# Altium PCB usb_breakout_004.PcbDoc
Units mil, origin at the board's own origin, x right, y up, seen from the top; angles counter-clockwise.
Board outline 1417.32 x 1417.32 mil, 2 copper layers (Top Layer, Bottom Layer); 32 components, 26 nets, 132 pads, 33 vias.
Unrouted connection lines stored in the file: 1.
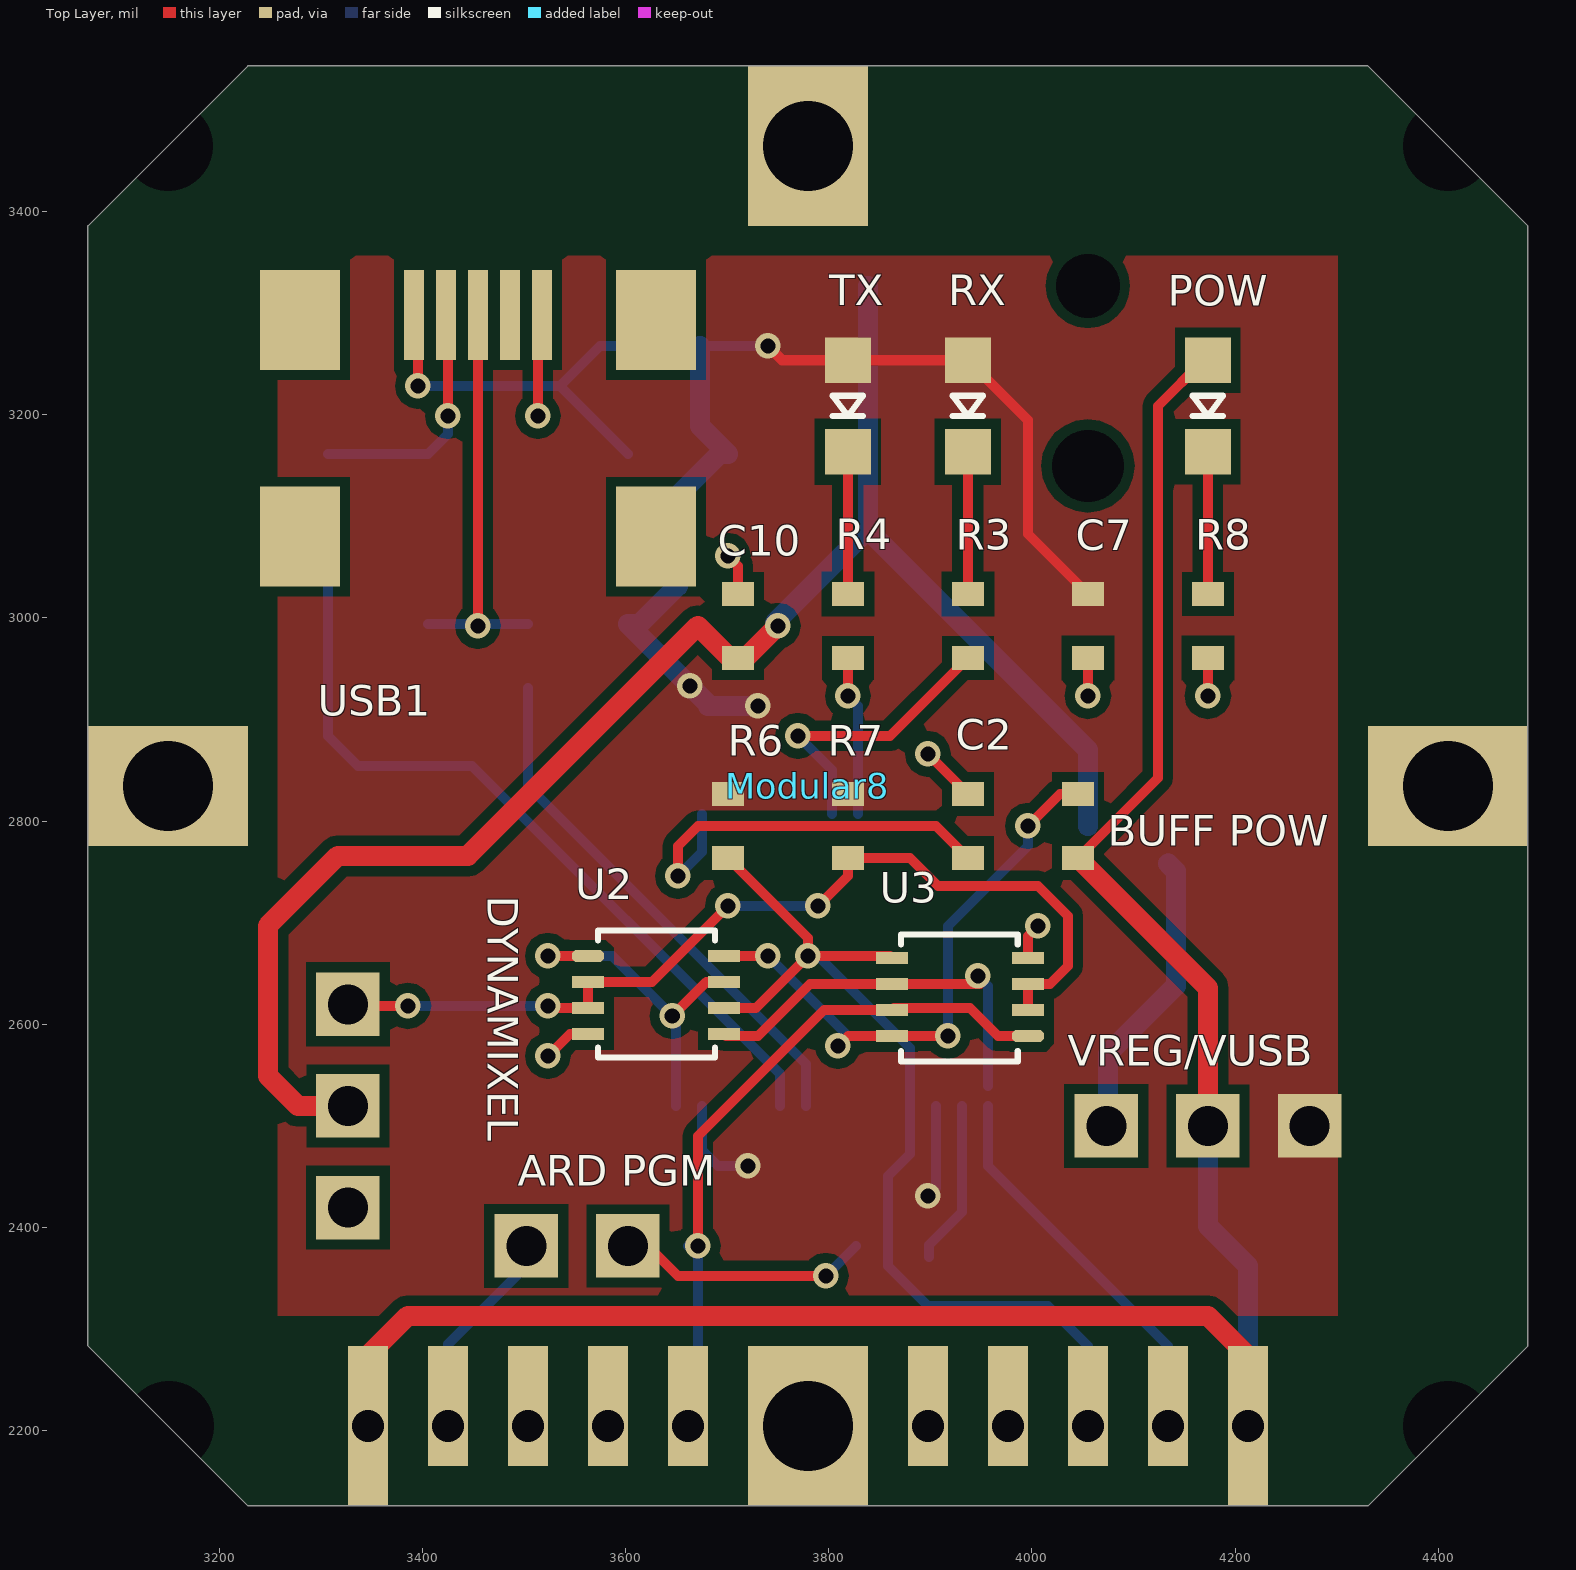
[diagram p0: Top Layer view]
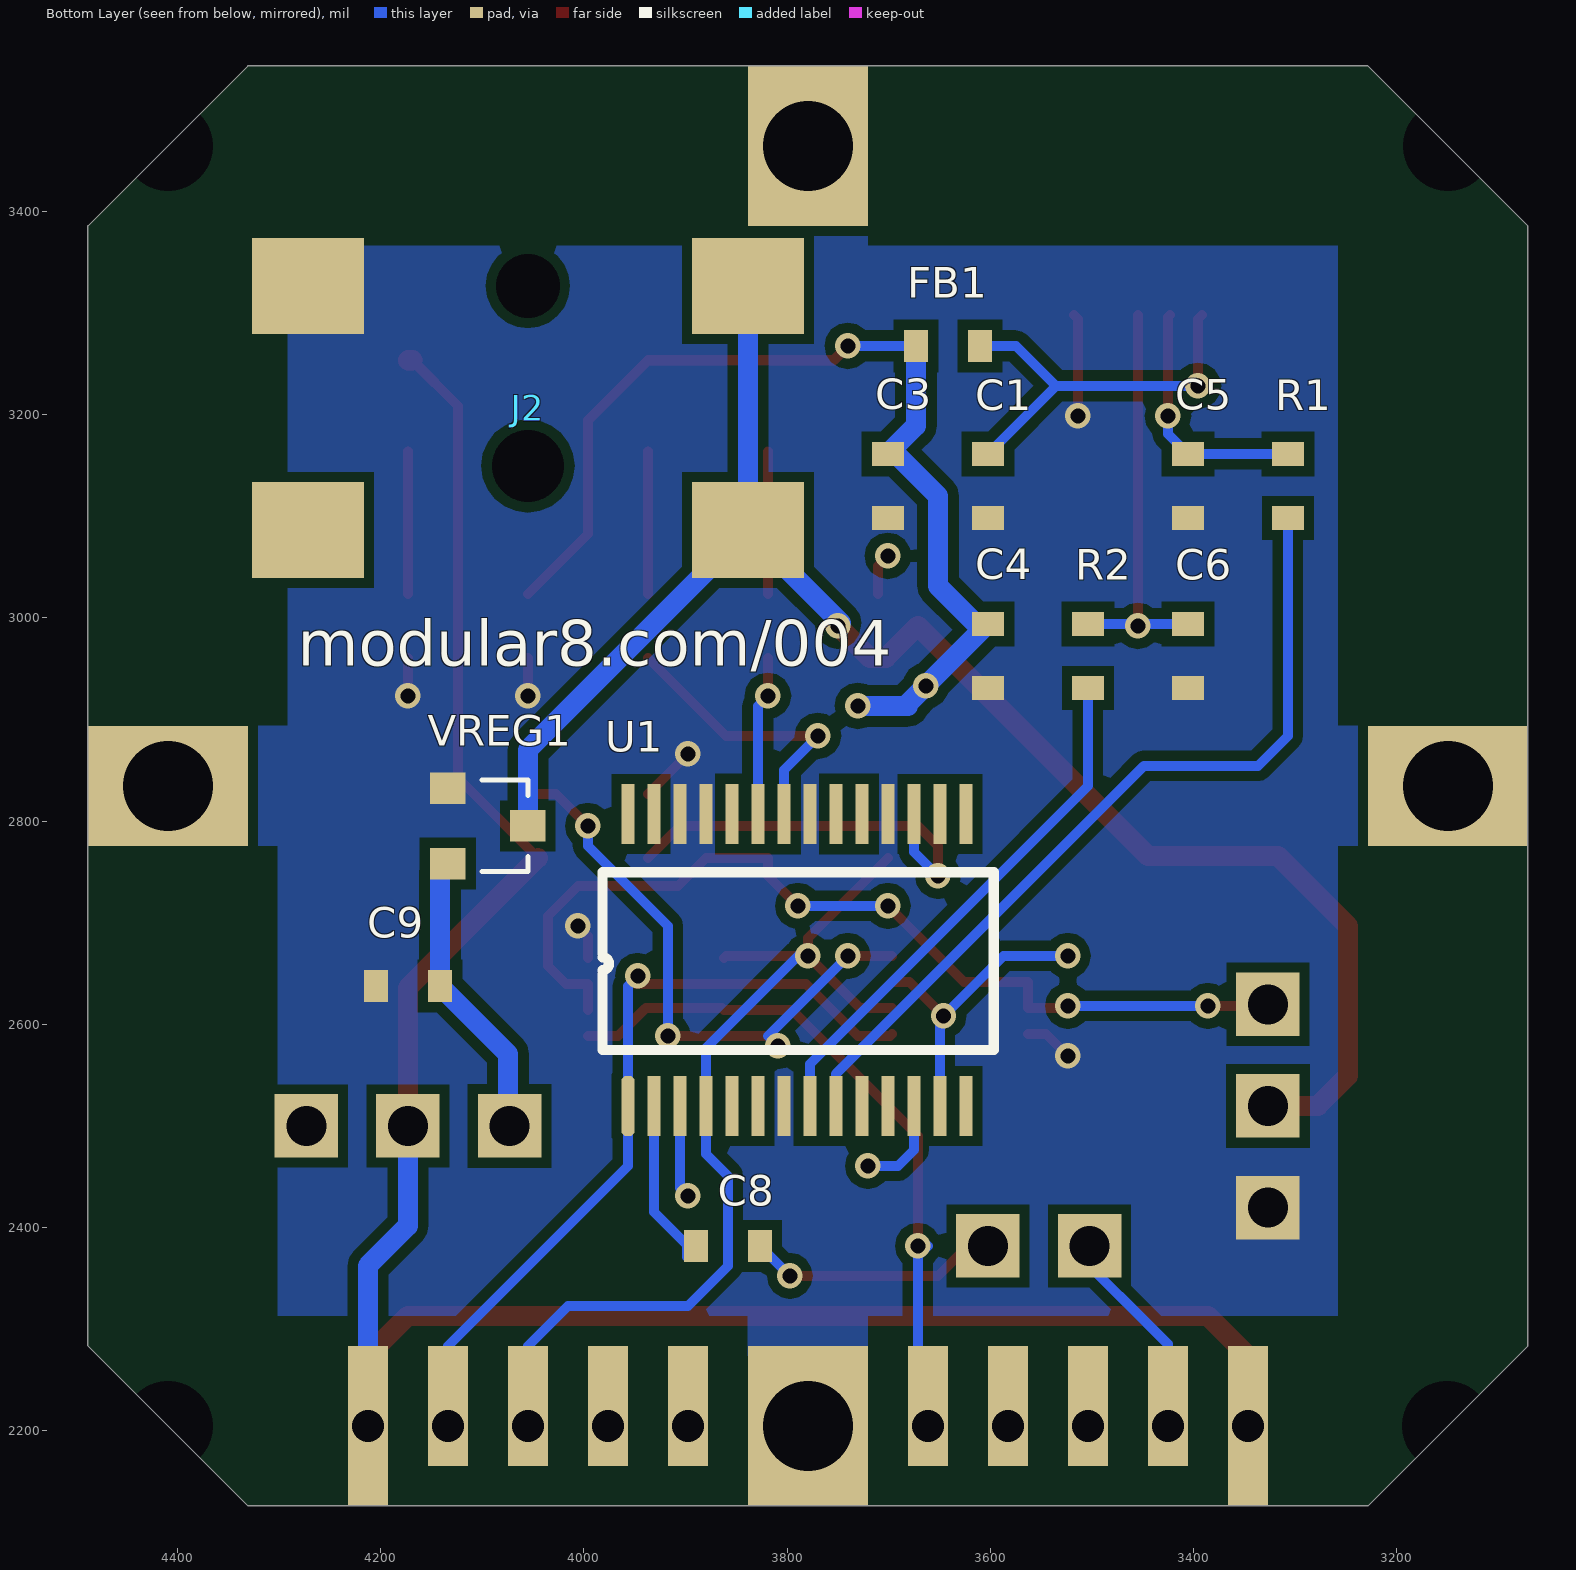
[diagram p1: Bottom Layer view, seen from below]

## Layer stack, top to bottom
Top Solder: solder mask 0.4, Solder Resist, Dk 3.5
Top Layer: signal copper 1.4
Dielectric 1: dielectric 12.6, FR-4, Dk 4.8
Bottom Layer: signal copper 1.4
Bottom Solder: solder mask 0.4, Solder Resist, Dk 3.5

## Board outline
3228.35,2125.98 3070.87,2283.46 3070.87,3385.83 3228.35,3543.31 4330.71,3543.31 4488.19,3385.83 4488.19,2283.46 4330.71,2125.98

## Design rules (kind name [scope] priority, off if disabled: settings)
Clearance [All] p1: gap=10
PolygonConnect [All] p1: connectstyle=Direct reliefconductorwidth=10 reliefentries=4 polygonreliefangle="90 Angle" airgapwidth=10
RoutingVias [All] p1: holewidth=28 width=50 viastyle="Through Hole" minholewidth=28 minwidth=50 maxholewidth=28 maxwidth=50
SolderMaskExpansion [All] p1: expansion=4
UnpouredPolygon [All] p1: allowunpoured=FALSE
Width [All] p1: maxlimit=20 minlimit=10 preferedwidth=10
29 further rules are at their usual default settings.

## Components (designator, comment, footprint, x,y, rotation, side; value= is the part's Value field where it differs from the comment)
"ARD PGM" "2x1" "2x1 THRU HOLES 0.1\" PITCH" 3602.36,2381.89 r90 top
"BUFF POW" "R 0" 0603 4045.28,2795.28 r90 top
C1 "C 0.01uF 25V" 0603 3602.36,3129.92 r270 bottom
C2 "C 0.1uF 25V" 0603 3937.01,2795.28 r90 top
C3 "C 0.1uF 25V" 0603 3700.79,3129.92 r270 bottom
C4 "C 10uF 25V" 0603 3602.36,2962.6 r270 bottom
C5 "C 47pF 50V" 0603 3405.51,3129.92 r270 bottom
C6 "C 47pF 50V" 0603 3405.51,2962.6 r270 bottom
C7 "C 0.1uF 25V" 0603 4055.12,2992.13 r270 top
C8 "C 0.1uF 25V" 0603 3858.27,2381.89 r180 bottom
C9 "C 1uF 25V" 0603 4173.23,2637.8 r180 bottom
C10 "C 0.1uF 25V" 0603 3710.63,2992.13 r90 top
DYNAMIXEL "Dynamixel 3-pin" "DYNAMIXEL 3-PIN" 3326.77,2519.68 r180 top (schematic designator J1)
FB1 "L Ferrite Bead 600ohm" 0603 3641.73,3267.72 r0 bottom
J2 "9V" "DC JACK 2.1MM SMT" 4055.12,3326.77 r270 bottom
Modular8 "modular8_rev2_D" "modular8 edge D flipped" 4409.45,3464.57 r180 top locked
POW "LEDG" "0805 - LED" 4173.23,3208.66 r270 top
R1 "R 27" 0603 3307.09,3129.92 r270 bottom
R2 "R 27" 0603 3503.94,2962.6 r270 bottom
R3 "R 680" 0603 3937.01,2992.13 r270 top
R4 "R 680" 0603 3818.9,2992.13 r270 top
R6 "R 10k" 0603 3700.79,2795.28 r270 top
R7 "PULLUP?" 0603 3818.9,2795.28 r270 top
R8 "R 680" 0603 4173.23,2992.13 r270 top
RX "LEDY" "0805 - LED" 3937.01,3208.66 r270 top (schematic designator RXLED)
TX "LEDY" "0805 - LED" 3818.9,3208.66 r270 top (schematic designator TXLED)
U1 "FT232RL" SSOP28 3956.69,2519.68 r90 bottom
U2 "TC7W241FU" MSOP8 3562.99,2667.32 r0 top
U3 "TC7W241FU" MSOP8 3996.06,2588.58 r180 top
USB1 "USB connector" "USB MINI" 3454.72,2962.6 r0 top
VREG1 "MCP1754ST 5V REG" SOT-23-3 4055.12,2795.28 r270 bottom
VREG/VUSB "3x1" "3x1 THRU HOLES 0.1\" PITCH" 4173.23,2500 r270 top (schematic designator VUSB/VREG)

## Footprints (in the part's own frame and the unit in brackets; to place one, negate y for a bottom-side part, rotate by r counter-clockwise, add the part's x,y. Pads: shape width x height; smd on the part's side, far side on the other; paste and mask are expansions set on the pad)
"2x1 THRU HOLES 0.1\" PITCH" [mil]
  rect 62.5x62.5 hole 39.37 unplated: 1(0,100) 2(0,0)
"3x1 THRU HOLES 0.1\" PITCH" [mil]
  rect 62.5x62.5 hole 39.37 unplated: 1(0,100) 2(0,0) 3(0,-100)
0603 [mm]
  rect 0.6x0.8 smd: 1(-0.8,0) 2(0.8,0)
  body extent -1.2,-0.5 1.2,0.5, height 0.01
"0805 - LED" [mil]
  rect 45x45 smd: 1(-45,0) 2(45,0)
  silkscreen extent -10,-15 10,15, body extent -72,-27 72,27, height 0
"DC JACK 2.1MM SMT" [mm]
  rect 2.4x2.8 smd: 1(0,5.5) 1(6.1,5.5) 2(0,-5.5) 3(6.1,-5.5)
  rect 0x0 hole 1.6 unplated: 999(0,0)
  rect 0x0 hole 1.803 unplated: 999(4.5,0)
  body extent -5.08,-7 9.88,7
"DYNAMIXEL 3-PIN" [mil]
  rect 62.5x62.5 hole 39.37 unplated: 1(0,100) 2(0,0) 3(0,-100)
  body extent -100,-165 75,160
"modular8 edge D flipped" [mm]
  rect 0x0 hole 2.25 unplated copper offset 0.5,0: 999(0,32) 999(0,0) 999(31.976,32) 999(32,0)
  rect 4x3 hole 2.25: A_GND(0,16) C_GND(32,16)
  rect 3x4 hole 2.25: B_GND(16,0) D_GND(16,32)
  rect 1x3 hole 0.8 copper offset 0,-0.5: D_0(7,32) D_1(9,32) D_2(11,32) D_3(13,32) D_4(19,32) D_5(21,32) D_6(23,32) D_7(25,32)
  rect 1x4 hole 0.8: D_V1(27,32) D_V2(5,32)
  body extent -2,-2 34,34
MSOP8 [mm]
  oct 0.8x0.3 smd: 1(0,0)
  rect 0.8x0.3 smd: 2(0,-0.65) 3(0,-1.3) 4(0,-1.95) 5(3.4,-1.95) 6(3.4,-1.3) 7(3.4,-0.65) 8(3.4,0)
  silkscreen extent 0.25,-2.54 3.17,0.63, body extent -0.5,-2.62 3.9,0.71
SOT-23-3 [mil]
  rect 31x35 smd: 1(-37,-79) 2(37,-79) 3(0,0)
  silkscreen extent -45,-45 45,0, body extent -57,-100 57,22, height 45
SSOP28 [mm]
  oct 1.5x0.325 smd: 1(0,0)
  rect 1.5x0.325 smd: 2(0,-0.65) 3(0,-1.3) 4(0,-1.95) 5(0,-2.6) 6(0,-3.25) 7(0,-3.9) 8(0,-4.55) 9(0,-5.2) 10(0,-5.85) 11(0,-6.5) 12(0,-7.15) 13(0,-7.8) 14(0,-8.45) 15(7.3,-8.45) 16(7.3,-7.8) 17(7.3,-7.15) 18(7.3,-6.5) 19(7.3,-5.85) 20(7.3,-5.2) 21(7.3,-4.55) 22(7.3,-3.9) 23(7.3,-3.25) 24(7.3,-2.6) 25(7.3,-1.95) 26(7.3,-1.3) 27(7.3,-0.65) 28(7.3,0)
  silkscreen extent 1.4,-9.14 5.84,0.64, body extent -0.76,-9.27 8.13,0.76
"USB MINI" [mm]
  rect 0.5x2.25 smd: 0(0.8,8.525) 1(-1.6,8.525) 2(-0.8,8.525) 3(0,8.525) 4(1.6,8.525)
  rect 2x2.5 smd: 5(-4.45,2.98) 5(-4.45,8.4) 5(4.45,2.98) 5(4.45,8.4)
  body extent -5.55,0 5.55,9.75, height 4

## Part data
J2: library part "SMT 2.1MM DC JACK"
R7: library part "R 10k"

## Via types
v1: diameter 25, hole 15, Top Layer to Bottom Layer, 33 vias

## Nets (pads, with @x,y where several pads share a name; then routed paths per layer and width w, separated by ;. In a path a pad name is that pad's centre, name@x,y a point inside that pad or via, vN(x,y) a via of type N, cw(c..) or ccw(c..) an arc to the next point about the centre after c; other vN are vias at no path point)
GND: C1.2 C2.2 C3.2 C4.2 C5.2 C6.2 C7.2 C9.1 C10.2 DYNAMIXEL.1 J2.2 Modular8.D_GND R8.2 U1.7 U1.18 U1.21 U1.25 U1.26 U2.4 U3.4 USB1.4 VREG1.1 | length 356.9
  Top Layer w10: v1(3513.78,3198.82) 3513.78,3294.29 USB1.4 ; v1(3523.62,2568.9) 3545.28,2590.55 U2.4 ; 3700.79,3061.02 3710.63,3051.18 C10.2 ; v1(3897.64,2866.14) C2.2 ; U3.4 3996.06,2687.01 v1(4005.91,2696.85) ; v1(4055.12,2923.23) C7.2 ; v1(4173.23,2923.23) R8.2
"NetARD PGM_1": "ARD PGM.1" Modular8.D_7 | length 217.3
  Bottom Layer w10: Modular8.D_7 3425.2,2285.04 3522.05,2381.89
"NetARD PGM_2": "ARD PGM.2" C8.2 | length 229.2
  Top Layer w10: 3622.05,2381.89 3651.57,2352.36 v1(3797.24,2352.36)
  Bottom Layer w10: v1(3797.24,2352.36) C8.2
"NetBUFF POW_2": "BUFF POW.2" U2.8 U3.8 | length 554.7
  Top Layer w10: U2.8 v1(3740.16,2667.32) ; 3818.9,2588.58 U3.8 v1(3917.32,2588.58) ; v1(3996.06,2795.28) 4027.56,2826.77 4045.28,2826.77
  Bottom Layer w10: v1(3740.16,2667.32) 3818.9,2588.58 ; v1(3917.32,2588.58) 3917.32,2696.85 3996.06,2775.59 v1(3996.06,2795.28)
  other v1: 3809.06,2578.74
NetC1_1: C1.1 FB1.1 USB1.1 | length 387.2
  Top Layer w10: USB1.1 3395.67,3294.29 v1(3395.67,3228.35)
  Bottom Layer w10: v1@3405.51,3228.35 3535.43,3228.35 ; C1.1 3535.43,3228.35 ; FB1.1 3574.8,3267.72 3535.43,3228.35
NetC2_1: C2.1 U1.17 | length 407
  Top Layer w10: v1(3651.57,2746.06) 3651.57,2775.59 3671.26,2795.28 3905.51,2795.28 C2.1
  Bottom Layer w10: v1(3651.57,2746.06) 3675.2,2769.69 U1.17
NetC5_1: C5.1 R1.1 USB1.2 | length 244.2
  Top Layer w10: USB1.2 3425.2,3296.26 v1(3425.2,3198.82)
  Bottom Layer w10: R1.1 C5.1 3425.2,3181.1 v1(3425.2,3198.82)
NetC6_1: C6.1 R2.1 USB1.3 | length 404.5
  Top Layer w10: v1(3454.72,2992.13) USB1.3
  Bottom Layer w10: C6.1 R2.1
NetC8_1: C8.1 U1.2 | length 162.1
  Bottom Layer w10: C8.1@3898.62,2371.06 3898.62,2382.87 3931.1,2415.36 U1.2
NetC9_2: C9.2 VREG1.2 VREG/VUSB.3 | length 289.8
  Bottom Layer w20: VREG/VUSB.3 4074.8,2501.57 4074.8,2570.87 C9.2 4141.73,2750.66 VREG1.2
NetC10_1: C10.1 DYNAMIXEL.2 J2.1 VREG1.3 | length 1639.6
  Top Layer w20: DYNAMIXEL.2 3277.56,2519.69 3248.03,2549.21 3248.03,2696.85 3316.93,2765.75 3444.88,2765.75 3671.26,2992.13 3702.76,2960.63 C10.1 3718.5,2960.63 v1(3750,2992.13)
  Bottom Layer w20: v1@3747.05,2995.08 J2.1@3838.58,3086.61 ; J2.1@3838.58,3326.77 J2.1@3838.58,3086.61 ; VREG1.3 4055.12,2870.08 J2.1@3838.58,3086.61
NetJ1_3: DYNAMIXEL.3 R7.2 U2.2 U2.3 U3.2 U3.3 | length 941.8
  Top Layer w10: DYNAMIXEL.3 3328.35,2618.11 v1(3385.83,2618.11) ; v1(3523.62,2618.11) 3525.59,2616.14 U2.3 U2.2 3625.98,2641.73 v1(3700.79,2716.54) ; v1(3789.37,2716.54) 3818.9,2746.06 R7.2 3879.92,2763.78 3907.48,2736.22 4005.91,2736.22 4035.43,2706.69 4035.43,2657.48 4017.72,2639.76 U3.3 U3.2
  Bottom Layer w10: v1(3385.83,2618.11) v1(3523.62,2618.11) ; v1(3700.79,2716.54) v1(3789.37,2716.54)
NetModular8_D_0: Modular8.D_0 U1.1 U2.5 U3.6 | length 783.4
  Top Layer w10: U2.5 3698.82,2588.58 3730.32,2588.58 3781.5,2639.76 U3.6 3948.82,2639.76 3946.84,2641.74 v1(3946.84,2647.63)
  Bottom Layer w10: v1(3946.84,2647.63) 3956.69,2637.78 U1.1@3956.69,2539.37 ; U1.1 3956.69,2460.63 4133.86,2283.46 Modular8.D_0
NetModular8_D_1: Modular8.D_1 R6.2 U1.4 U2.6 U3.5 | length 986.1
  Top Layer w10: U2.6 3728.35,2616.14 v1(3779.53,2667.32) ; R6.2 3779.53,2685.04 v1(3779.53,2667.32) ; U3.5 3860.24,2667.32 v1(3779.53,2667.32)
  Bottom Layer w10: v1(3779.53,2667.32) 3789.37,2667.32 3879.92,2576.77 U1.4 3879.92,2472.44 3858.27,2450.79 3858.27,2362.2 3897.64,2322.83 4015.75,2322.83 4055.12,2283.46 Modular8.D_1
NetModular8_D_4: Modular8.D_4 U3.1 U3.7 | length 741
  Top Layer w10: Modular8.D_4 Modular8.D_4@3661.42,2263.78 ; v1(3671.26,2381.89) 3671.26,2490.16 3795.28,2614.17 U3.7 3864.11,2616.08 3939.04,2616.08 3966.53,2588.58 U3.1
  Bottom Layer w10: Modular8.D_4 3671.26,2214.57 3671.26,2372.05 v1@3661.42,2381.89
NetPOW_2: POW.2 R8.1 | length 140
  Top Layer w10: R8.1 POW.2
NetR1_2: R1.2 U1.9 | length 828.8
  Bottom Layer w10: R1.2 3307.09,2883.86 3336.61,2854.33 3448.87,2854.33 3751.97,2551.23 U1.9
NetR2_2: R2.2 U1.8 | length 524.8
  Bottom Layer w10: R2.2 3503.94,2834.64 3777.56,2561.02 U1.8
NetR3_1: R3.1 RX.2 | length 140
  Top Layer w10: R3.1 RX.2
NetR4_1: R4.1 TX.2 | length 140
  Top Layer w10: R4.1 TX.2
RXLED#: R3.2 U1.22 | length 289.8
  Top Layer w10: v1(3769.68,2883.86) 3860.24,2883.86 R3.2
  Bottom Layer w10: v1(3769.68,2883.86) 3803.15,2850.39 U1.22
SLEEP#: 
TXDEN: U1.13 U2.1 U2.7 | length 341
  Top Layer w10: v1(3523.62,2667.32) U2.1 ; v1(3646.11,2608.27) 3679.57,2641.73 U2.7
  Bottom Layer w10: v1(3523.62,2667.32) 3587.06,2667.32 v1(3646.11,2608.27) 3649.61,2604.77 U1.13
TXLED#: R4.2 U1.23 | length 157.6
  Top Layer w10: v1(3818.9,2923.23) R4.2
  Bottom Layer w10: v1(3818.9,2923.23) 3828.74,2913.39 U1.23
VCC: C3.1 C4.1 C7.1 FB1.2 R6.1 R7.1 RX.1 TX.1 U1.3 U1.12 VREG/VUSB.1 | length 1236.2
  Top Layer w10: v1(3740.16,3267.72) 3754.21,3253.66 TX.1 RX.1 3996.06,3194.61 3996.06,3082.68 C7.1
  Bottom Layer w10: FB1.2 v1(3740.16,3267.72) ; U1.12 3675.2,2476.38 3690.94,2460.63 v1(3720.47,2460.63) ; v1(3897.64,2431.1) 3905.51,2438.98 U1.3
  Bottom Layer w20: FB1.2 3673.23,3188.98 C3.1 3692.91,3161.42 3651.57,3120.08 3651.57,3031.5 3614.17,2994.09 C4.1 v1(3663.39,2933.07) 3683.07,2913.39 ; 3681.1,2913.39 3683.07,2913.39 ; v1(3730.32,2913.39) 3683.07,2913.39
VCHIP: "BUFF POW.1" Modular8.D_V1 Modular8.D_V2 POW.1 VREG/VUSB.2 | length 2249.6
  Top Layer w10: 4045.28,2763.78 4124.02,2842.52 4124.02,3208.66 POW.1@4169.02,3253.66
  Top Layer w20: Modular8.D_V1 3346.46,2273.62 3385.83,2312.99 4173.23,2312.99 4212.6,2273.62 Modular8.D_V2 ; 4045.28,2763.78 4173.23,2635.83 VREG/VUSB.2 4153.54,2500 VREG/VUSB.2@4153.54,2480.31 ; POW.1@4169.02,3253.66 POW.1
  Bottom Layer w20: VREG/VUSB.2 4173.23,2401.57 4212.6,2362.21 Modular8.D_V2
pads on no net: J2.3 J2.999 Modular8.999 Modular8.A_GND Modular8.B_GND Modular8.C_GND Modular8.D_2 Modular8.D_3 Modular8.D_5 Modular8.D_6 U1.5 U1.6 U1.10 U1.11 U1.14 U1.15 U1.16 U1.19 U1.20 U1.24 U1.27 U1.28 USB1.0 USB1.5
copper on no net:
  other v1: 3700.79,3061.02

## Polygon pours and split planes (outlines as drawn)
GND on Bottom Layer "Bottom Layer-No Net" (solid, remove dead copper, pour order 4): 3720.47,3395.67 3720.47,3366.14 3257.87,3366.14 3257.87,2893.7 3208.66,2893.7 3208.66,2785.43 3198.82,2775.59 3257.87,2775.59 3257.87,2312.99 3720.47,2312.99 3720.47,2273.62 3838.58,2273.62 3838.58,2312.99 4301.18,2312.99 4301.18,2775.59 4340.55,2775.59 4340.55,2893.7 4291.34,2893.7 4291.34,3346.46 4271.65,3366.14 3828.74,3366.14 3828.74,3395.67 3838.58,3405.51
VCC on Top Layer "Bottom Layer-No Net" (solid, remove dead copper, pour order 2): 3257.87,3366.14 3267.72,3356.3 4301.18,3356.3 4301.18,2312.99 3257.87,2312.99

## Silkscreen, mask and mechanical layers (free items; w line width, h text height)
Bottom Overlay:
  text "modular8.com/004" at 4281.5,2952.76 h45